# Altium PCB 1ch motor drive.PcbDoc
Units mm, origin at the board's own origin, x right, y up, seen from the top; angles counter-clockwise.
Board outline 40 x 32 mm, 2 copper layers (Top Layer, Bottom Layer); 6 components, 11 nets, 28 pads, 0 vias.
Unrouted connection lines stored in the file: 1.
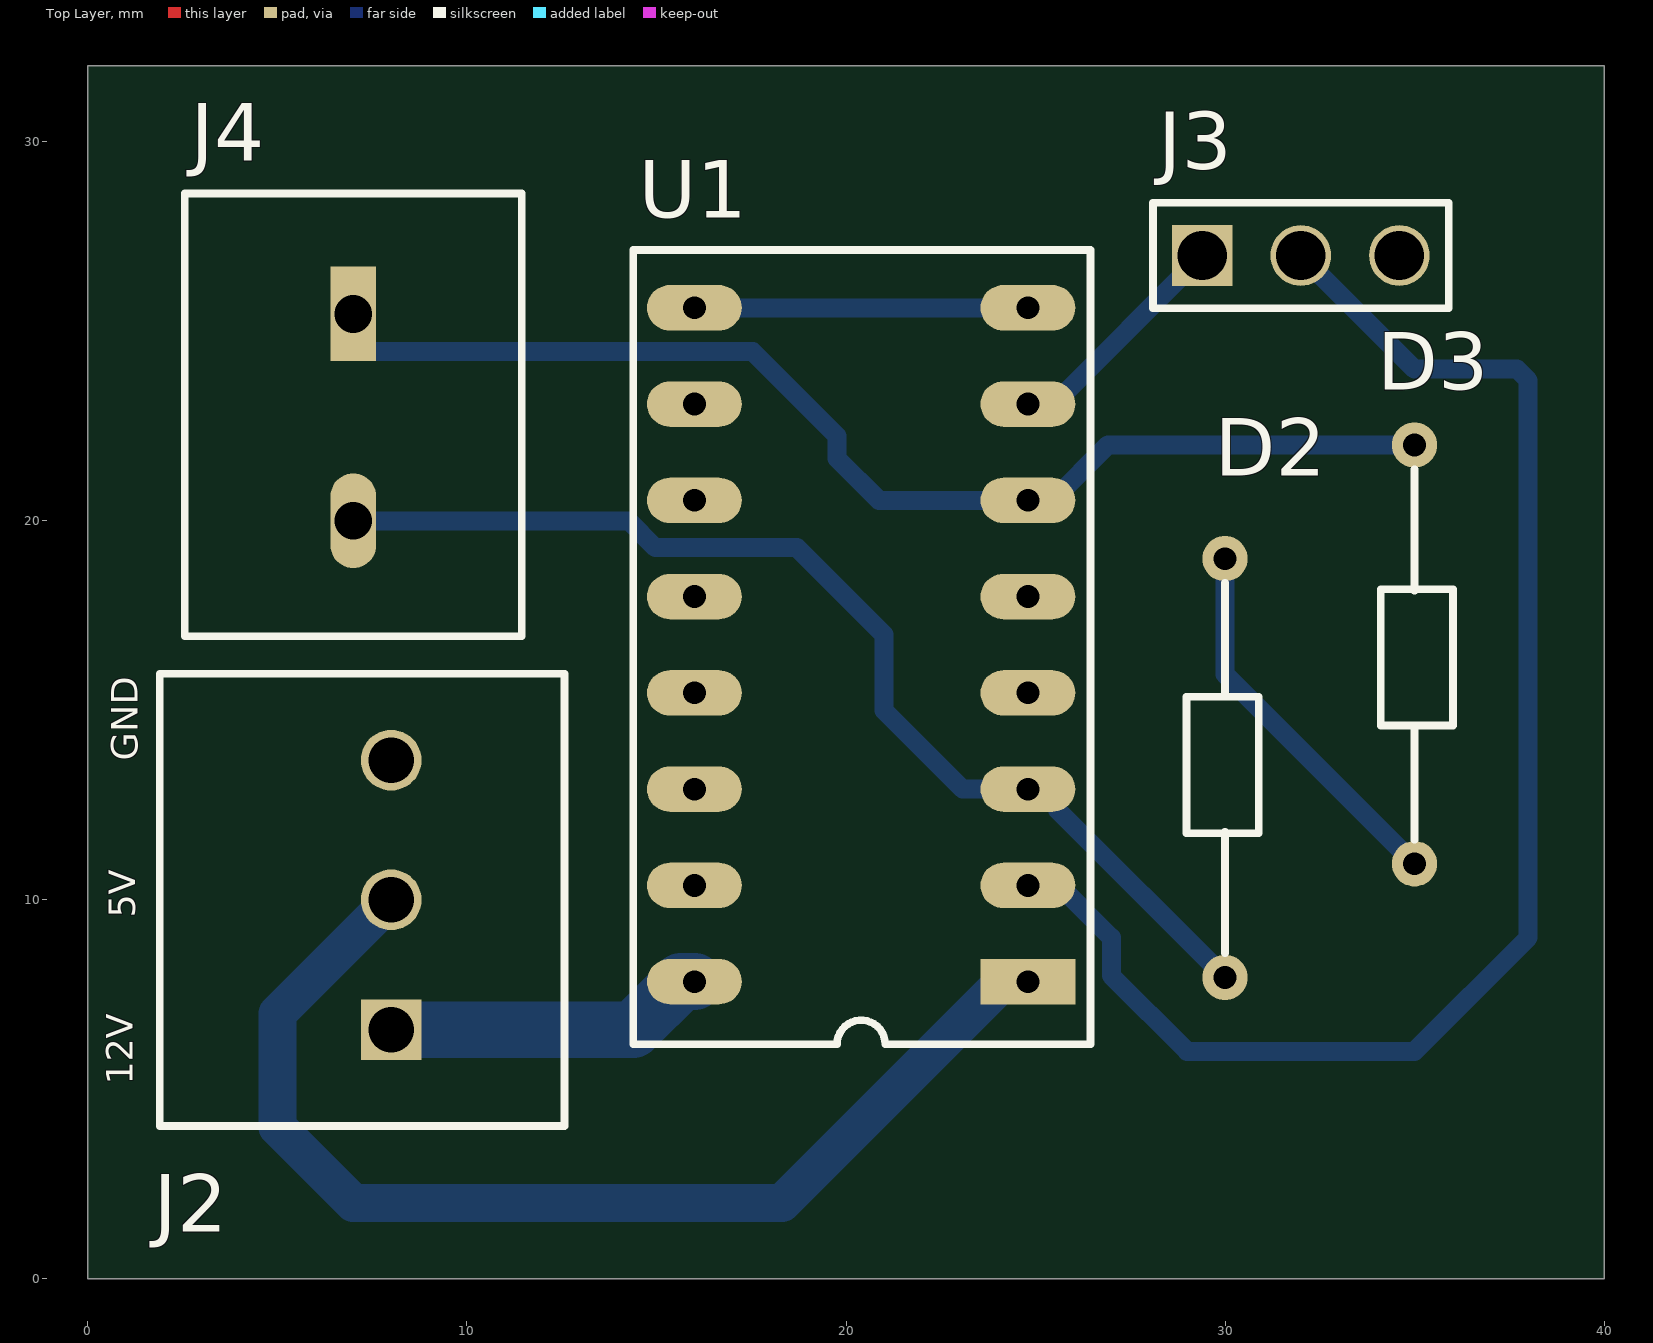
[diagram p0: Top Layer view]
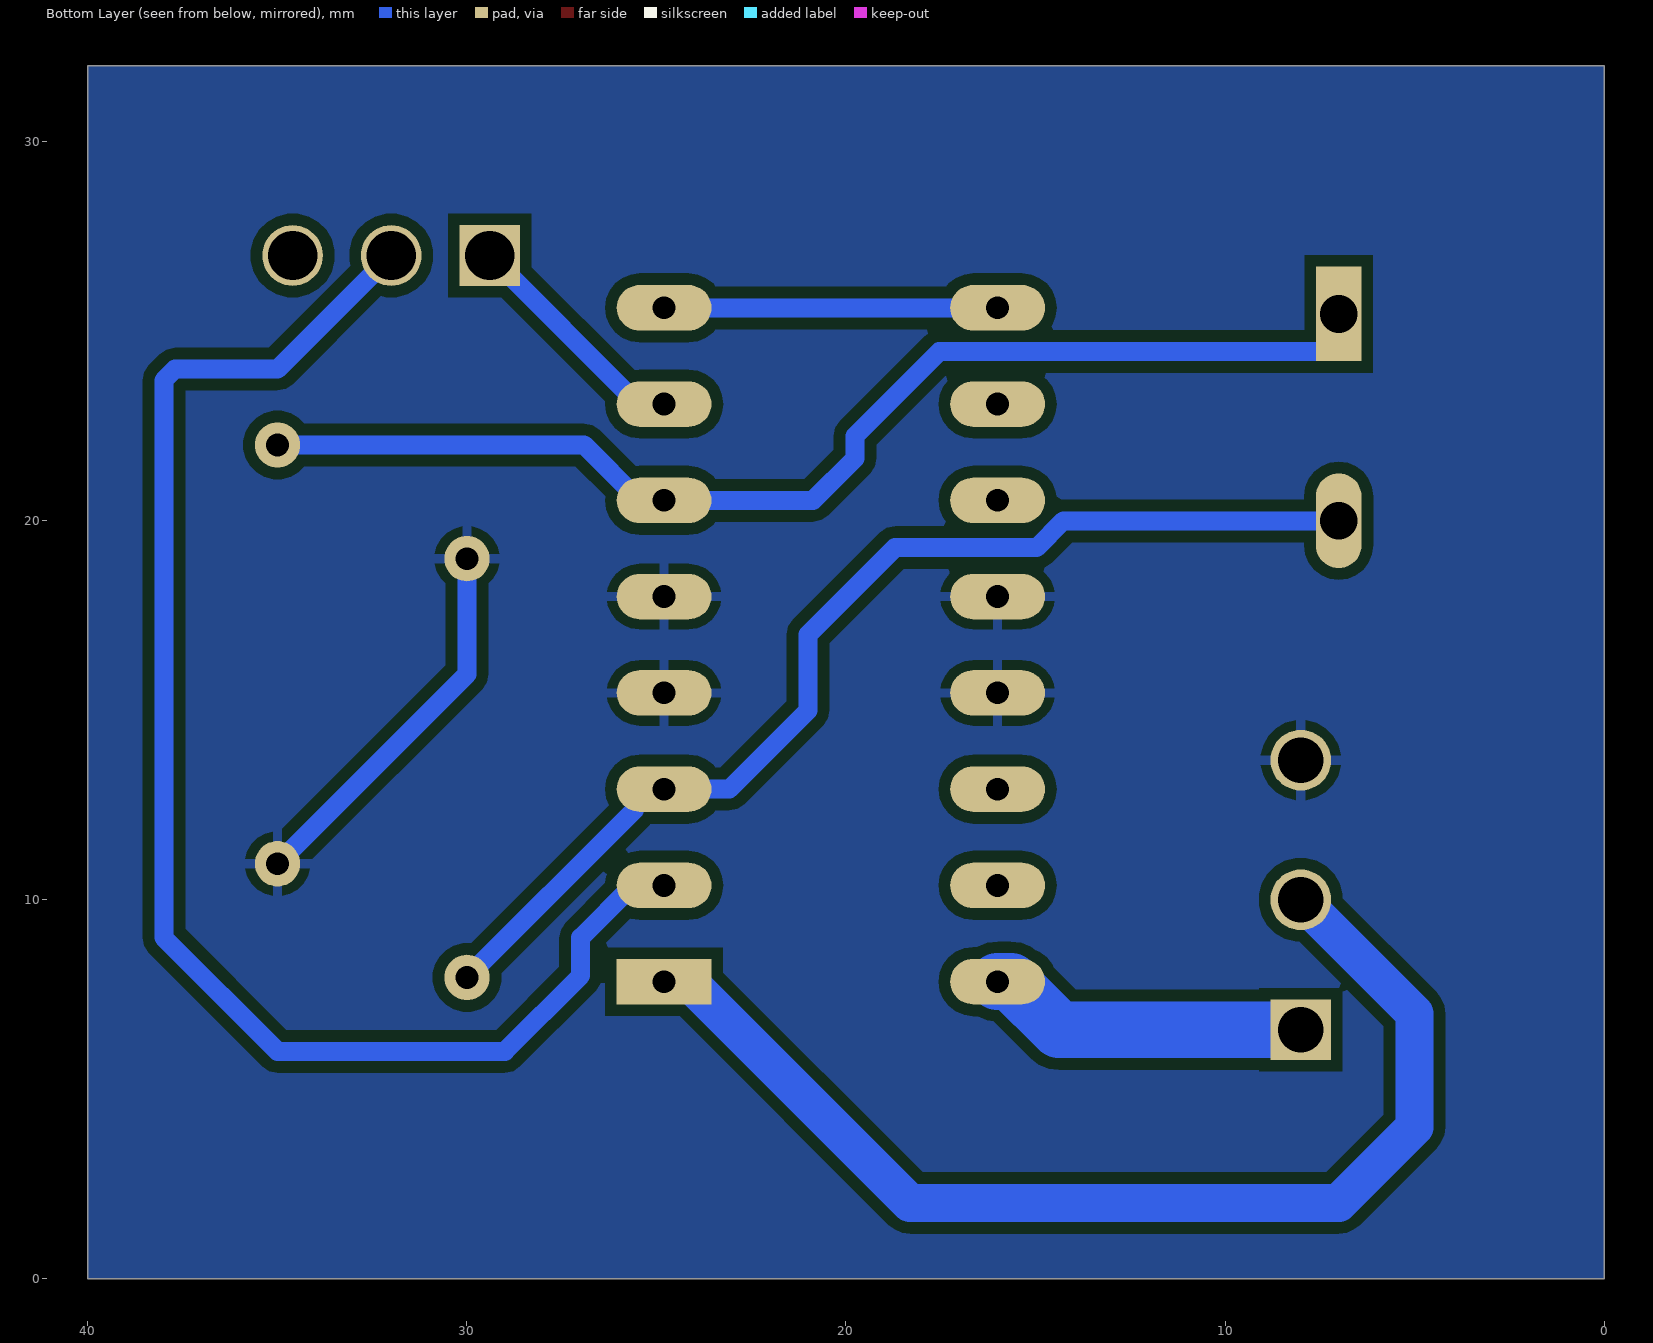
[diagram p1: Bottom Layer view, seen from below]
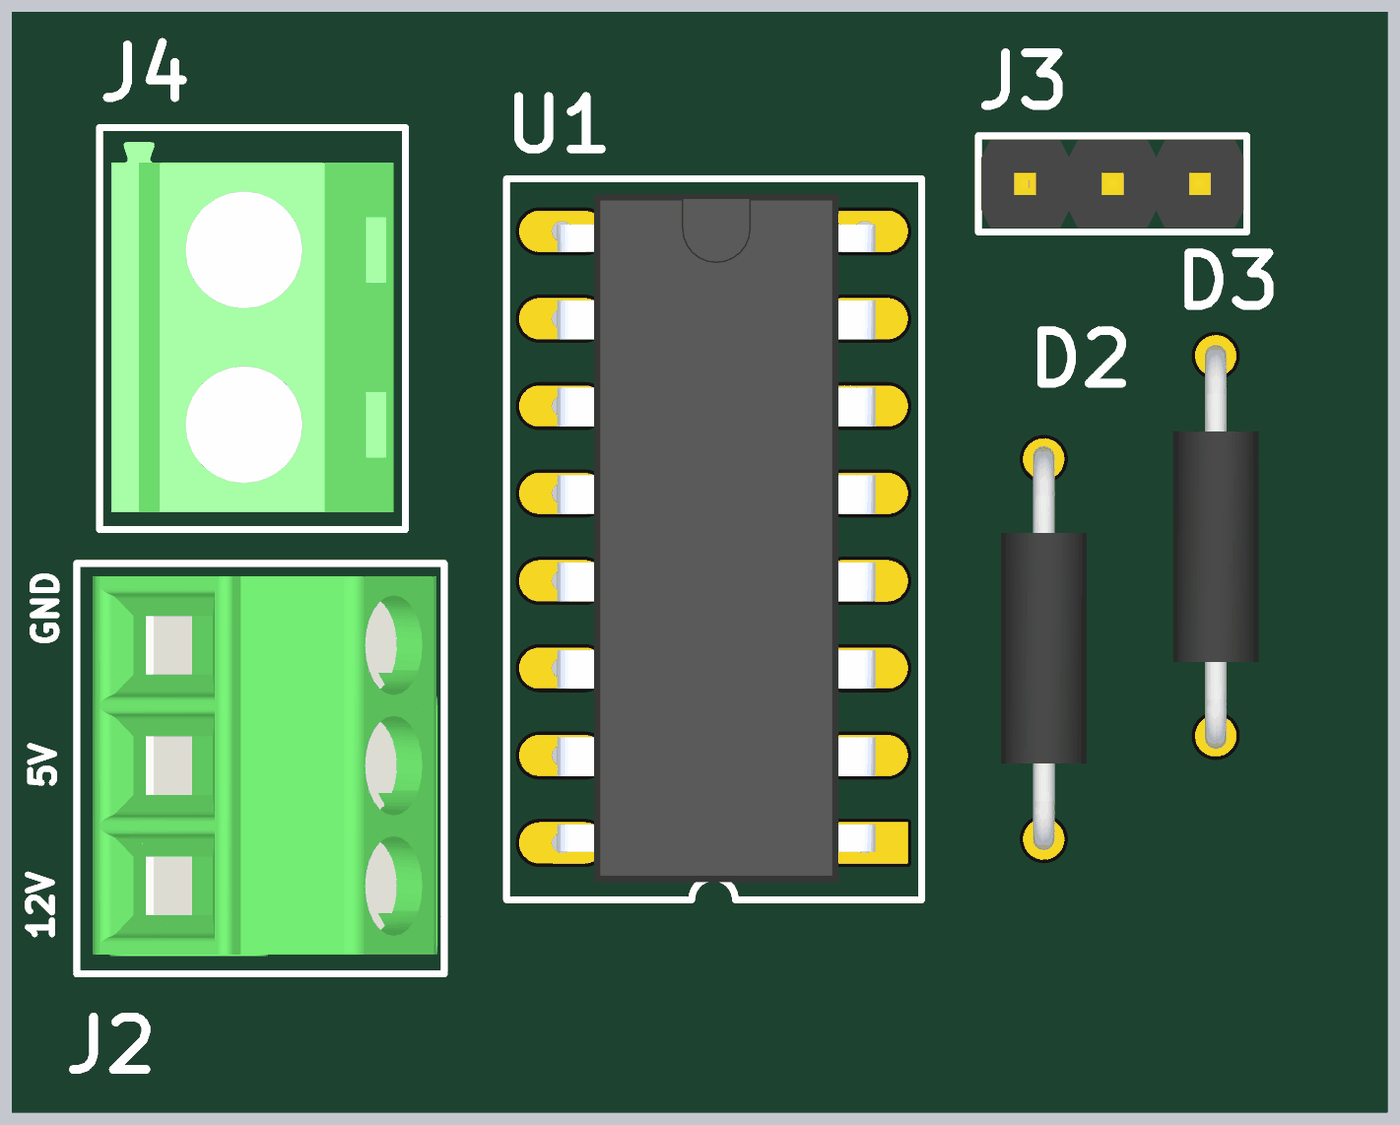
[diagram p2: 3D render of the assembled board from above, using the file's embedded part models]

## Layer stack, top to bottom
Top Solder: solder mask 0.0102, Solder Resist, Dk 3.5
Top Layer: signal copper 0.0356
Dielectric 1: dielectric 0.32, FR-4, Dk 4.8
Bottom Layer: signal copper 0.0356
Bottom Solder: solder mask 0.0102, Solder Resist, Dk 3.5

## Board outline
0,0 40,0 40,32 0,32

## Design rules (kind name [scope] priority, off if disabled: settings)
Clearance [All] p1: gap=0.3 ignorepadtopadclearanceinfootprint=FALSE
PolygonConnect [All] p1: connectstyle=Relief reliefconductorwidth=0.254 reliefentries=4 polygonreliefangle="90 Angle" airgapwidth=0.254
RoutingVias [All] p1: holewidth=0.711 width=1.27 viastyle="Through Hole" minholewidth=0.711 minwidth=1.27 maxholewidth=0.711 maxwidth=1.27
SolderMaskExpansion [All] p1: expansion=0.102 istentingtop=FALSE
SupplyNets "Schematic Supply Nets_4" [InNet('GND 2')] p1: voltage=0.000
SupplyNets "Schematic Supply Nets_3" [InNet('+5')] p2: voltage=0.000
SupplyNets "Schematic Supply Nets_2" [InNet('VCC')] p3: voltage=0.000
SupplyNets "Schematic Supply Nets_1" [InNet('+12')] p4: voltage=0.000
SupplyNets "Schematic Supply Nets" [InNet('GND')] p5: voltage=0.000
Width [All] p1: maxlimit=3 minlimit=0.3 preferedwidth=0.5 minimp=50.000000 maximp=50.000000 favimp=50.000000
30 further rules are at their usual default settings.

## Components (designator, comment, footprint, x,y, rotation, side; value= is the part's Value field where it differs from the comment)
D2 "1N4001" 330ohm_TH 30,19.127 r270 top
D3 "1N4001" 330ohm_TH 35,10.824 r90 top
J2 "power" "TERMINAL BLOCK 3PIN" 15.874,7.079 r180 top
J3 "motor input" "pin header male" 29.4,27 r90 top
J4 "motor output" header 6.365,30.414 r270 top
U1 "L293D" L293D 24.8,7.84 r180 top

## Footprints (in the part's own frame and the unit in brackets; to place one, negate y for a bottom-side part, rotate by r counter-clockwise, add the part's x,y. Pads: shape width x height; smd on the part's side, far side on the other; paste and mask are expansions set on the pad)
330ohm_TH [mm]
  round 1.2 hole 0.6: 1(0.127,0) 2(11.176,0)
  silkscreen extent 0.76,-1.02 10.54,0.89, body extent -0.24,-1.24 11.49,1.24, height 2.49
header [mm]
  rect 2.5x1.2 hole 1: 1(4.953,0.635)
  oval 2.5x1.2 hole 1: 2(10.414,0.635)
  silkscreen extent 1.78,-3.81 13.46,5.08, body extent 2.19,-3.46 12.95,4.73, height 10
L293D [mm]
  rect 2.5x1.2 hole 0.6: 1(0,0)
  oval 2.5x1.2 hole 0.6: 2(0,-2.54) 3(0,-5.08) 4(0,-7.62) 5(0,-10.16) 6(0,-12.7) 7(0,-15.24) 8(0,-17.78) 9(8.8,-17.78) 10(8.8,-15.24) 11(8.8,-12.7) 12(8.8,-10.16) 13(8.8,-7.62) 14(8.8,-5.08) 15(8.8,-2.54) 16(8.8,0)
  silkscreen extent -1.65,-19.3 10.41,1.65, body extent -0.3,-18.86 8.94,1.14, height 5.1
"pin header male" [mm]
  rect 1.6x1.6 hole 1.3: 1(0,0)
  round 1.6 hole 1.3: 2(0,-2.6) 3(0,-5.2)
  silkscreen extent -1.4,-6.5 1.4,1.3, body extent -1.27,-6.41 1.27,1.21, height 7.27
"TERMINAL BLOCK 3PIN" [mm]
  rect 1.6x1.6 hole 1.2: 1(7.874,0.508)
  round 1.6 hole 1.2: 2(7.874,-2.921) 3(7.874,-6.604)
  silkscreen extent 3.3,-8.89 13.98,3.05, body extent 3.49,-8.51 13.52,2.52, height 9.53

## Part data
D2 D3: library part diode, Forward Voltage="1.1 V", Maximum Full Load Reverse Current,="30 μA", Power Dissipation="3.0 W", Reverse Current at Rated V="5.0 μA"
J2: library part "3pin terminal block"
J3: library part "pin header male"
J4: library part "terminal block_TH"
U1: library part L293d

## Nets (pads, with @x,y where several pads share a name; then routed paths per layer and width w, separated by ;. In a path a pad name is that pad's centre, name@x,y a point inside that pad or via, vN(x,y) a via of type N, cw(c..) or ccw(c..) an arc to the next point about the centre after c; other vN are vias at no path point)
+5: J2.2 U1.1 U1.8 U1.9 | length 39.1
  Bottom Layer w0.5: U1.9 U1.8
  Bottom Layer w1: J2.2 5,7 5,4 7,2 18.31,2 24.15,7.84 U1.1
+12: J2.1 U1.16 | length 8.5
  Bottom Layer w1.5: J2.1 14.381,6.571 15.65,7.84 U1.16
GND: 
"GND 2": D2.1 D3.1 J2.3 U1.4 U1.5 U1.12 U1.13 | length 10.1
  Bottom Layer w0.5: D2.1 30,15.951 D3.1
NetD1_1: 
NetD1_2: 
NetD2_2: D2.2 J4.2 U1.3 | length 29.3
  Bottom Layer w0.5: J4.2 14.264,20 14.971,19.293 18.707,19.293 21,17 21,15 23.08,12.92 U1.3 25.261,12.92 25.584,12.597 25.584,12.367 D2.2
NetD3_2: D3.2 J4.1 U1.6 | length 31.4
  Bottom Layer w0.5: J4.1 7,24.811 7.35,24.461 17.539,24.461 19.761,22.239 19.761,21.649 20.87,20.54 U1.6 25.45,20.54 26.91,22 D3.2
NetJ3_1: J3.1 U1.7 | length 6.2
  Bottom Layer w0.5: U1.7 25.48,23.08 J3.1
NetJ3_2: J3.2 U1.2 | length 38.9
  Bottom Layer w0.5: U1.2 25.62,10.38 27,9 27,8 29,6 35,6 38,9 38,23.707 37.707,24 35,24 J3.2
VCC: 
pads on no net: J3.3 U1.10 U1.11 U1.14 U1.15

## Polygon pours and split planes (outlines as drawn)
"GND 2" on Bottom Layer "GND_2_L02_P000" (solid, pour order 0): 0,32 40,32 40,0 0,0

## Silkscreen, mask and mechanical layers (free items; w line width, h text height)
Top Overlay:
  text "GND" at 1.313,13.663 h0.7 r90
  text "5V" at 1.246,9.529 h0.7 r90
  text "12V" at 1.179,5.123 h0.7 r90